# Altium PCB Gate Driver.PcbDoc (part 1 of 3)
Units mm, origin at the board's own origin, x right, y up, seen from the top; angles counter-clockwise.
Board outline 66.31 x 39.31 mm, 4 copper layers (L1 (Sig), L2 (-8V), L3 (POWER), L4 (Sig)), stack 0.603 mm thick; 125 components, 59 nets, 325 pads, 255 vias.
Unrouted connection lines stored in the file: 241.
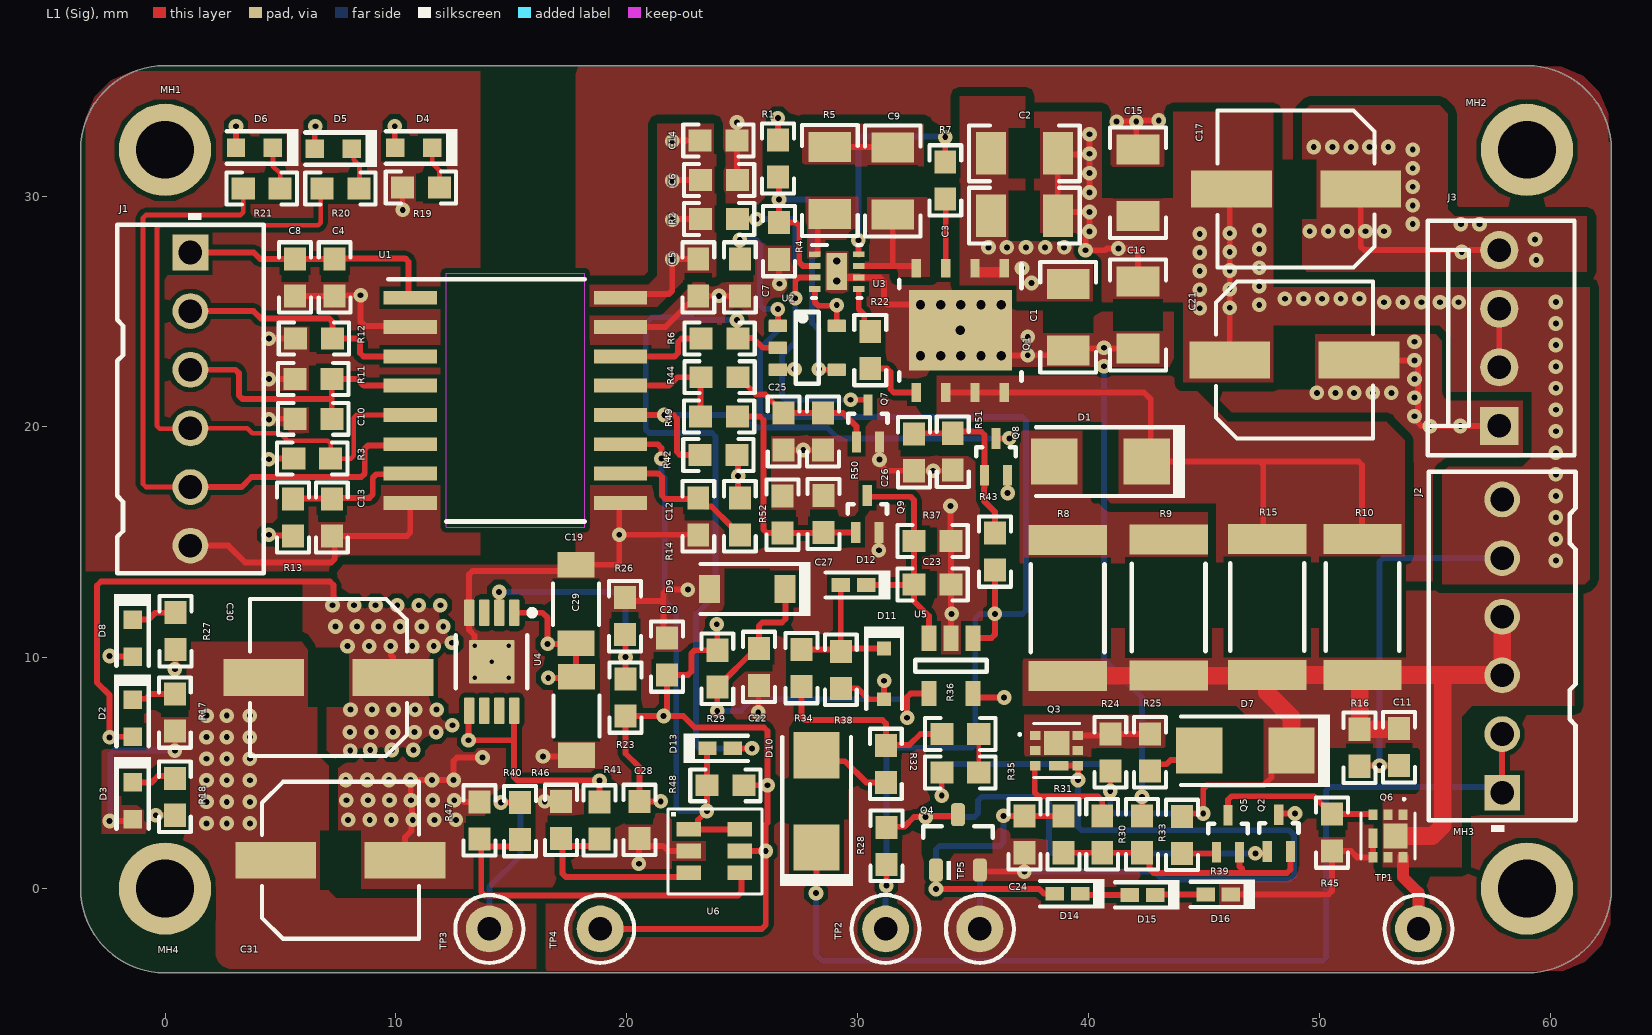
[diagram p0: L1 (Sig) view]
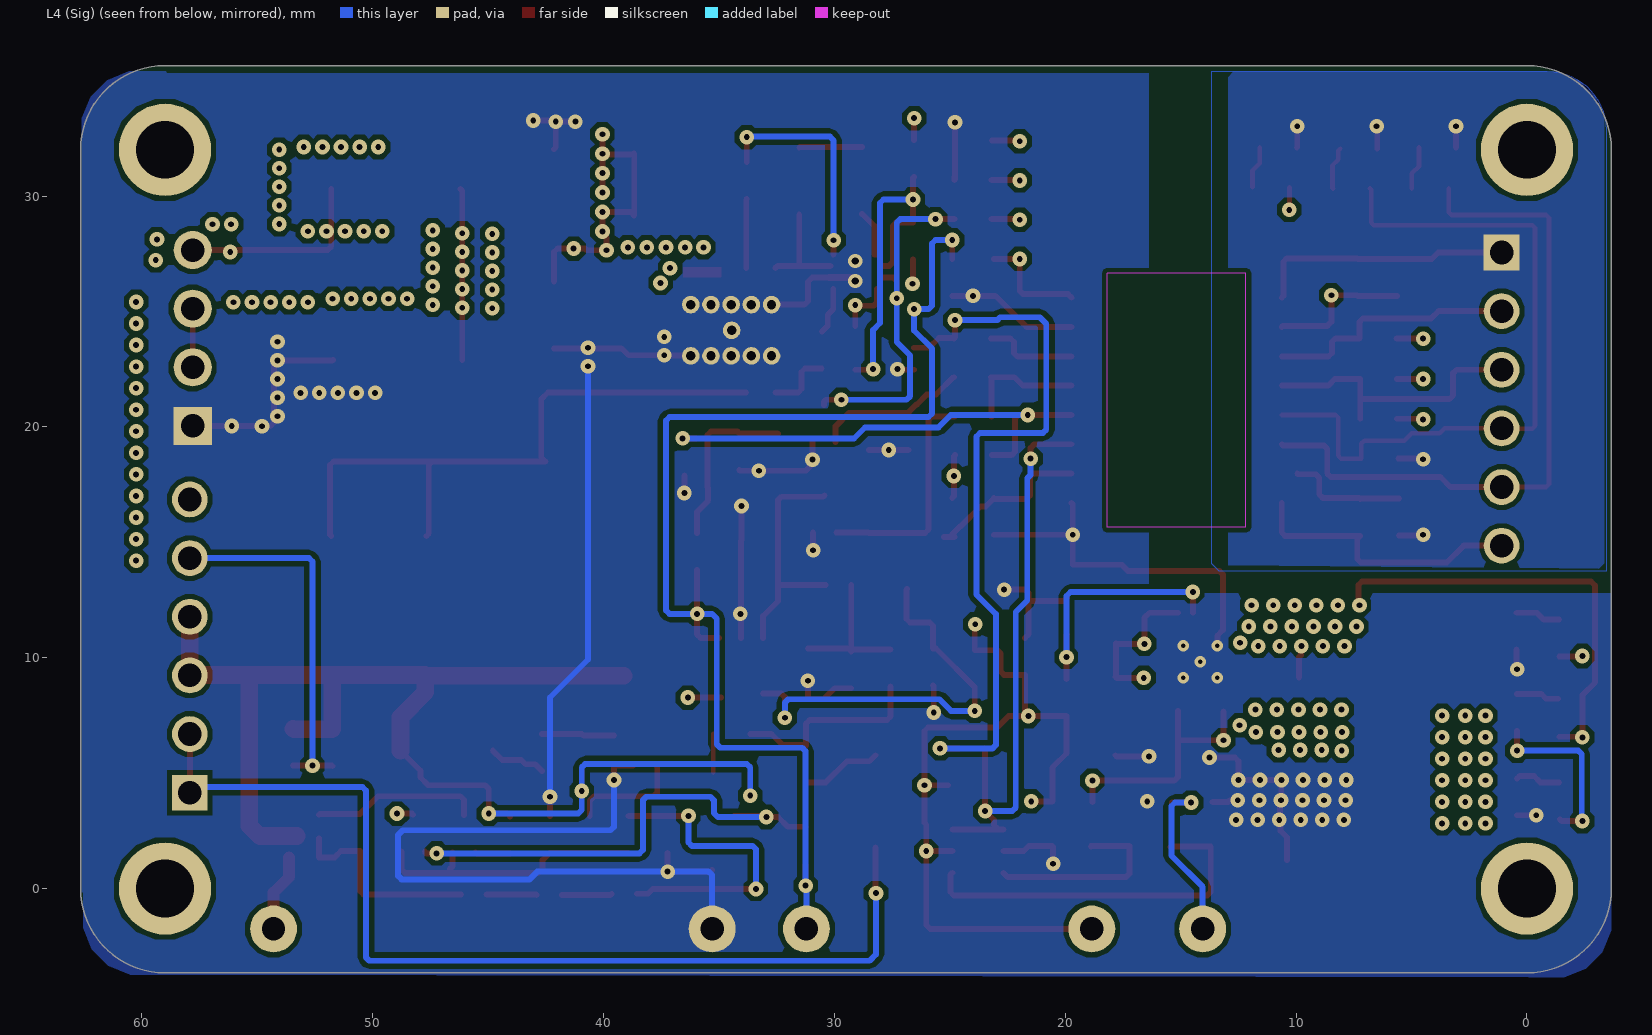
[diagram p1: L4 (Sig) view, seen from below]
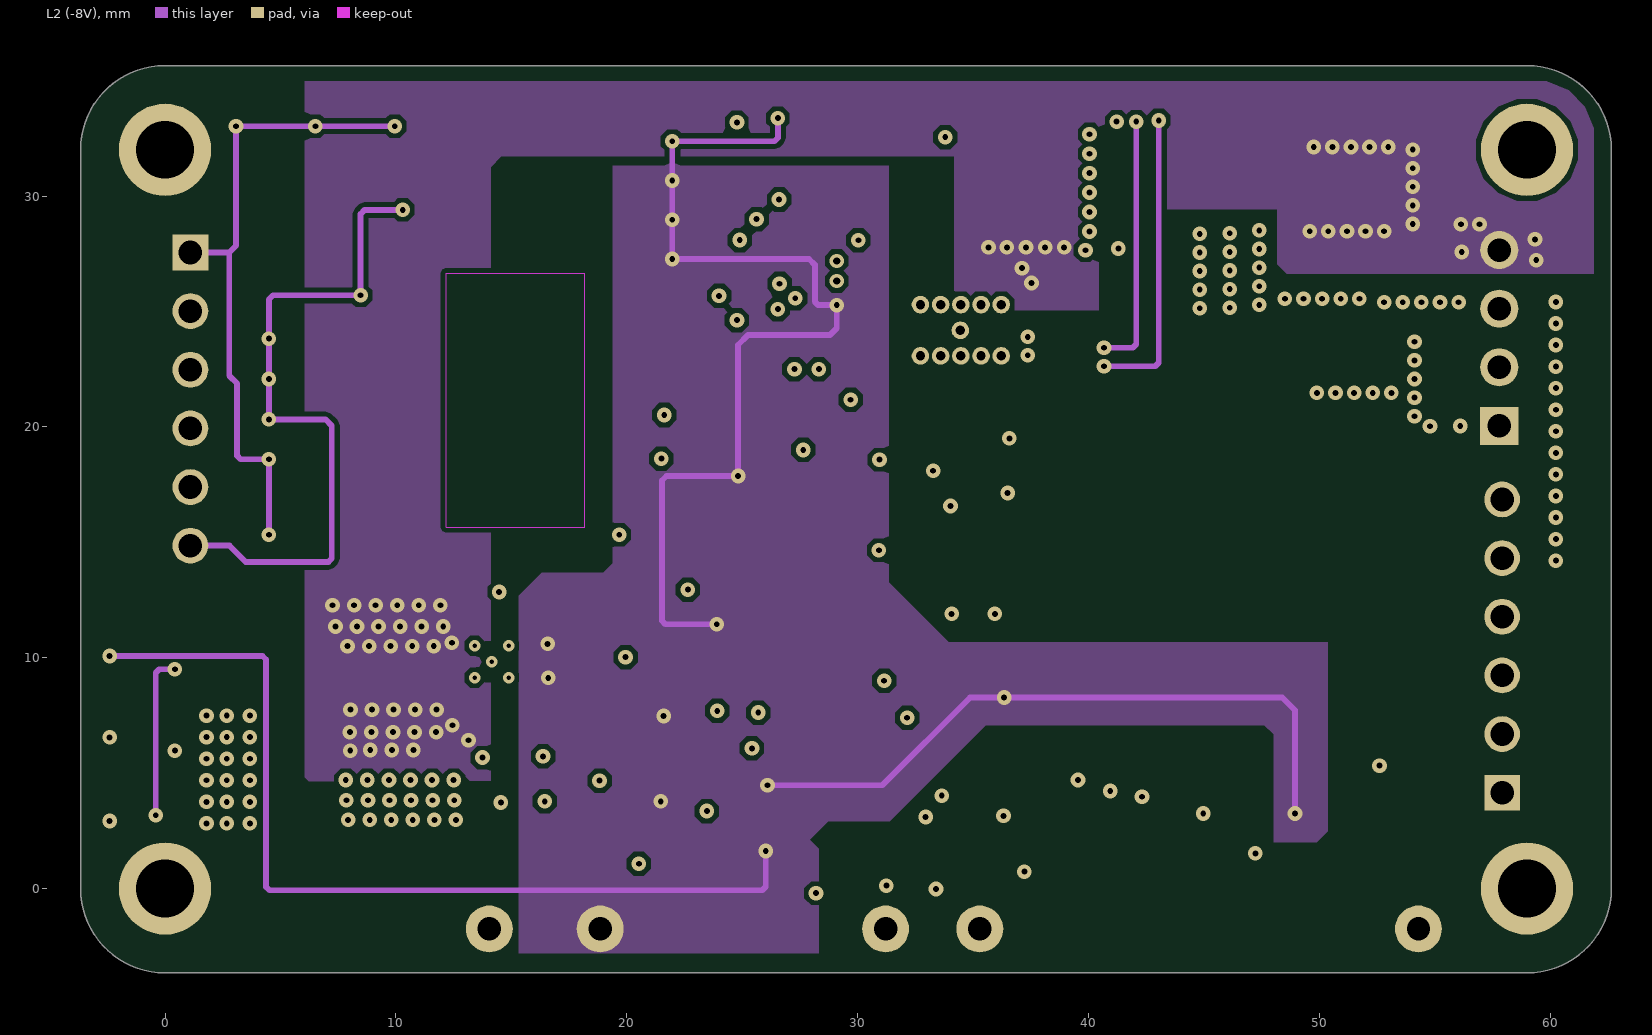
[diagram p2: L2 (-8V)]
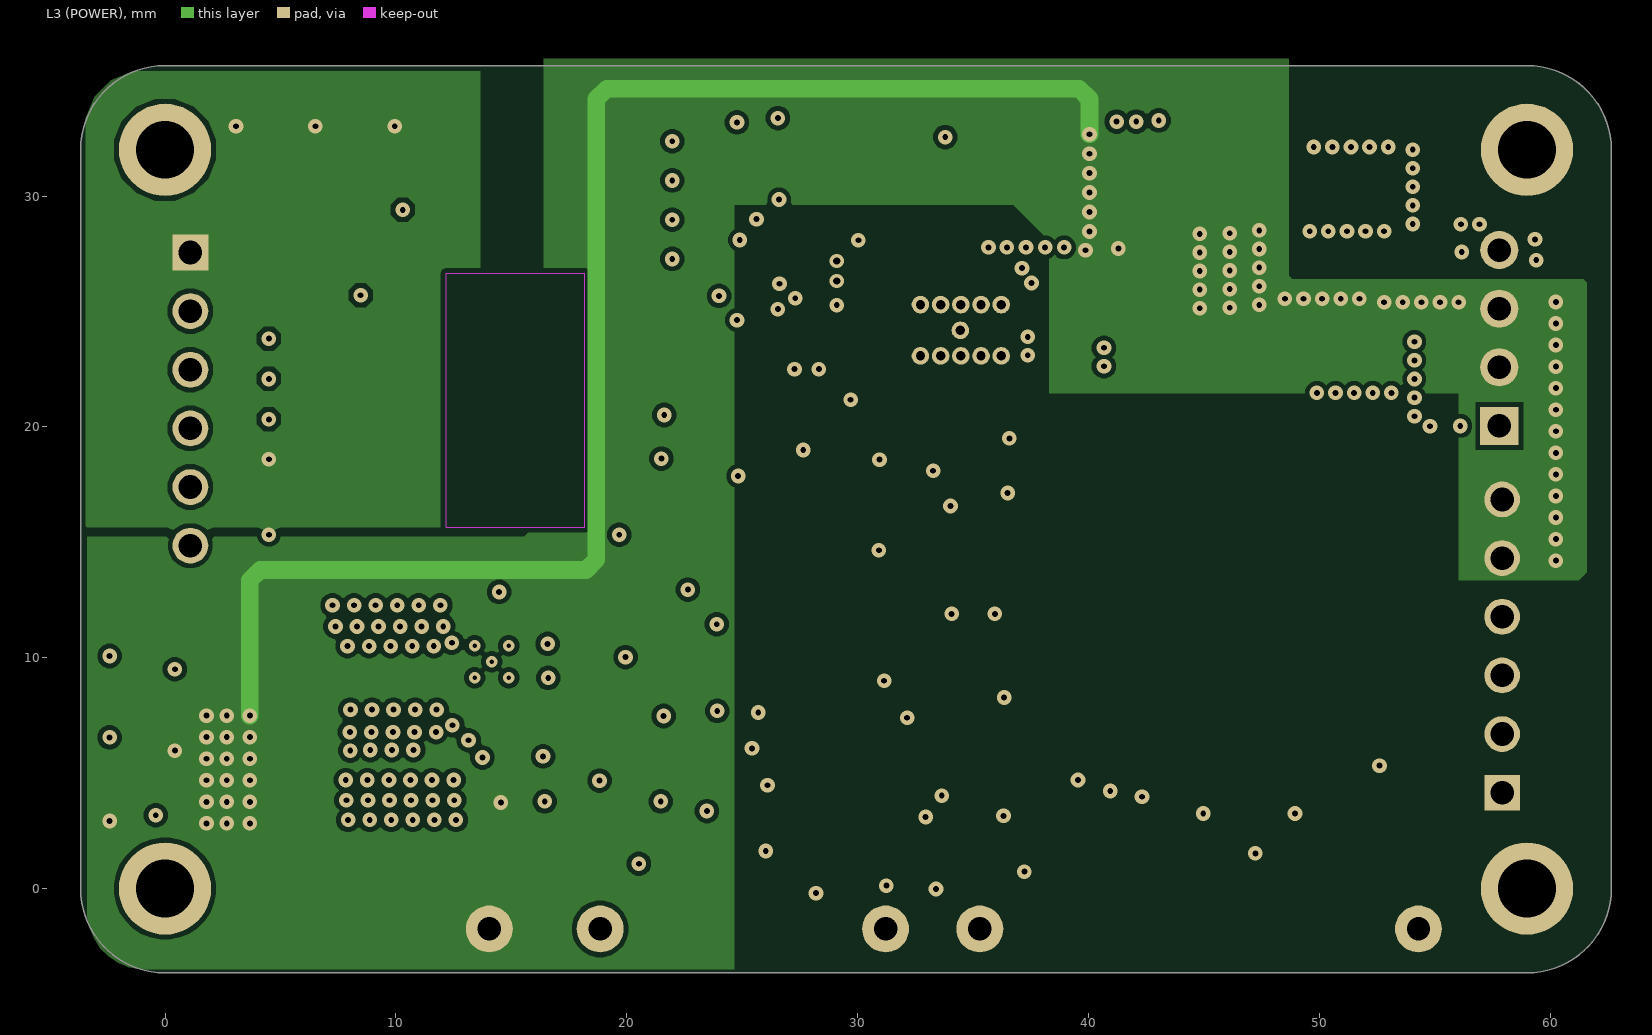
[diagram p3: L3 (POWER)]

## Layer stack, top to bottom
Top Solder: solder mask 0.0102, Solder Resist, Dk 3.5
L1 (Sig): signal copper 0.0356
Dielectric 2: prepreg 0.0711, PP-006, Dk 4.1
L2 (-8V): signal copper 0.035
Dielectric 1: dielectric 0.32, FR-4, Dk 4.8
L3 (POWER): signal copper 0.035
Dielectric 3: prepreg 0.0711, PP-006, Dk 4.1
L4 (Sig): signal copper 0.0356
Bottom Solder: solder mask 0.0102, Solder Resist, Dk 3.5

## Board outline
0,-3.653 cw(c0,0) -3.653,0 -3.653,32 cw(c0,32) 0,35.653 59,35.653 cw(c59,32) 62.653,32 62.653,0 cw(c59,0) 59,-3.653

## Design rules (kind name [scope] priority, off if disabled: settings)
AcuteAngle [All] p1: minimum=4.50000000000000E+0001 checktracksonly=FALSE
AssemblyTestPointUsage [All] p1: valid=2
Clearance Poly_Poly [InPolygon vs InPolygon] p1: gap=0.381 ignorepadtopadclearanceinfootprint=FALSE
Clearance "Poly_ All" [InPolygon] p2: gap=0.203 ignorepadtopadclearanceinfootprint=FALSE
Clearance "Less Than 9 mils from PAD to PAD" [(InPadClass('Less than 9 Mil Clearance')) vs (InPadClass('Less than 9 Mil Clearance'))] p3: gap=0.051 ignorepadtopadclearanceinfootprint=FALSE
Clearance "SMT Pin Via" [IsVia vs IsSMTPin] p4: gap=0 ignorepadtopadclearanceinfootprint=FALSE
Clearance "Via to Via" [IsVia vs IsVia] p5: gap=0.127 ignorepadtopadclearanceinfootprint=FALSE
Clearance [All] p6: gap=0.102 ignorepadtopadclearanceinfootprint=FALSE
ComponentClearance ComponentClearance_Shunt [InComponentClass('Header') vs InComponentClass('Shunt')] p1: gap=0 collisioncheckmode=3 verticalgap=0 showdistances=TRUE checkcomponentboundary=TRUE
ComponentClearance ComponentClearance_Logo [InComponentClass('Logo')] p2: gap=0.254 collisioncheckmode=3 verticalgap=0.254 showdistances=TRUE checkcomponentboundary=TRUE
ComponentClearance ComponentClearance_ScrewToNut [(HasFootprint('NY PMS 440 0025 PH')) vs (HasFootprint('Keystone_1902C'))] p3: gap=0.127 collisioncheckmode=3 verticalgap=0.127 showdistances=TRUE checkcomponentboundary=TRUE
ComponentClearance ComponentClearance_MountingHoles [InComponentClass('Mounting Holes')] p4: gap=0.508 collisioncheckmode=3 verticalgap=2540 showdistances=TRUE checkcomponentboundary=TRUE
ComponentClearance ComponentClearance_SmallPassives [HasFootprint('0201*') or HasFootprint('0402*') or HasFootprint('0508') or HasFootprint('0603*') or HasFootprint('0612') or HasFootprint('0805*') or HasFootprint('0815*') or HasFootprint('0830*') or HasFootprint('1206*') or HasFootprint('1210*') or HasFootprint('1808*') or HasFootprint('1812*') or HasFootprint('1825*') or HasFootprint('2010*') or HasFootprint('2220*') or HasFootprint('2225*') or HasFootprint('2512*') or HasFootprint('2728*') or HasFootprint('3518*') vs HasFootprint('0201*') or HasFootprint('0402*') or HasFootprint('0508') or HasFootprint('0603*') or HasFootprint('0612') or HasFootprint('0805*') or HasFootprint('0815*') or HasFootprint('0830*') or HasFootprint('1206*') or HasFootprint('1210*') or HasFootprint('1808*') or HasFootprint('1812*') or HasFootprint('1825*') or HasFootprint('2010*') or HasFootprint('2220*') or HasFootprint('2225*') or HasFootprint('2512*') or HasFootprint('2728*') or HasFootprint('3518*')] p5: gap=0.102 collisioncheckmode=3 verticalgap=0.102 showdistances=TRUE checkcomponentboundary=TRUE
ComponentClearance ComponentClearance_THtoSMT [IsThruComponent vs IsSMTComponent] p6: gap=0.254 collisioncheckmode=3 verticalgap=0.254 showdistances=TRUE checkcomponentboundary=TRUE
ComponentClearance ComponentClearance_THtoTH [IsThruComponent vs IsThruComponent] p7: gap=0.254 collisioncheckmode=3 verticalgap=0.254 showdistances=TRUE checkcomponentboundary=TRUE
ComponentClearance [All] p8: gap=0.102 collisioncheckmode=3 verticalgap=0.102 showdistances=TRUE checkcomponentboundary=TRUE
DiffPairsRouting [All] p1: maxlimit=2.54 minlimit=0.254 mostfreqgap=0.254 toplayer_minwidth=0.381 toplayer_maxwidth=0.381 toplayer_prefwidth=0.381 midlayer1_minwidth=0.381 midlayer1_maxwidth=0.381 midlayer1_prefwidth=0.381 midlayer2_minwidth=0.381 midlayer2_maxwidth=0.381 midlayer2_prefwidth=0.381 bottomlayer_minwidth=0.381 bottomlayer_maxwidth=0.381 bottomlayer_prefwidth=0.381 maxuncoupledlength=25.4
FabricationTestPointUsage TestPointUsage [All] p1: valid=2 allowmultiple=FALSE
FabricationTestpoint Testpoint [All] p1: side=3 testpointundercomponent=TRUE minsize=1.016 maxsize=2.54 preferedsize=1.524 minholesize=0 maxholesize=1.016 preferedholesize=0.813 testpointgrid=0.025 allowsidetop=TRUE allowsidebottom=TRUE usegrid=TRUE gridtolerance=0
FanoutControl Fanout_LCC [IsLCC] p1: bgadir=Out bgaviamode=Centered fanoutstyle=Auto fanoutdirection=Alternating viagrid=0.025 // Fanout_LCC (Default Rule)
FanoutControl Fanout_BGA [IsBGA] p2: bgadir=Out bgaviamode=Centered fanoutstyle=Auto fanoutdirection=Alternating viagrid=0.025 // Fanout_BGA (Default Rule)
FanoutControl Fanout_Default [All] p4: bgadir=Out bgaviamode=Centered fanoutstyle=Auto fanoutdirection=Alternating viagrid=0.025 // Fanout_Default (Default Rule)
FanoutControl Fanout_Small [(CompPinCount < 5)] p5: bgadir=Out bgaviamode=Centered fanoutstyle=Auto fanoutdirection=OutThenIn viagrid=0.025 // Fanout_Small (Default Rule)
Height [All] p1: minheight=0 maxheight=254 prefheight=50.8
HoleSize [All] p1: absolutevalues=TRUE maxlimit=2.54 minlimit=0.15 maxpercent=80.000 minpercent=20.000
HoleToHoleClearance [All] p1: gap=0.102 allowstackedmicrovias=TRUE
MinimumAnnularRing MinimumAnnularRing_ThermalPadVias [IsVia and InAnyComponent] p1: minimumring=0.15
MinimumAnnularRing [All] p2: minimumring=0.15
MinimumSolderMaskSliver MinimumSolderMaskSliver_Logo [InComponentClass('Logo') vs InComponentClass('Logo')] p1: minsoldermaskwidth=0.18
MinimumSolderMaskSliver [All] p2: minsoldermaskwidth=0
PlaneConnect [All] p1: planeconnectstyle=Relief reliefexpansion=0.254 reliefentries=4 reliefconductorwidth=0.254 reliefairgap=0.254
PolygonConnect [All] p1: connectstyle=Direct reliefconductorwidth=0.254 reliefentries=4 polygonreliefangle="90 Angle" airgapwidth=0.254
RoutingCorners [All] p1: cornerstyle=45-Degree minsetback=0.635 maxsetback=0.635
RoutingVias [All] p1: holewidth=0.254 width=0.635 viastyle="Through Hole" minholewidth=0.203 minwidth=0.508 maxholewidth=0.305 maxwidth=0.813
SMDToCorner [All] p1: distance=30000
SilkToSilkClearance [All] p1: silktosilkclearance=0.102
SilkToSolderMaskClearance SilkscreenOverComponentPads [IsPad] p1: minsilkscreentomaskgap=0.127 clearancetoexposedcopper=TRUE
SolderMaskExpansion SolderMaskExpansion_via [IsVia] p1: expansion=0.102 istentingtop=TRUE
SolderMaskExpansion [All] p2: expansion=0.064 istentingtop=FALSE
UnRoutedNet [All] p1: checkbadconnections=TRUE
UnpouredPolygon [All] p1: allowunpoured=TRUE allowshelved=TRUE
Width Width_power [InNetClass('POWER')] p1: maxlimit=1.27 minlimit=0.254 preferedwidth=0.762
Width [All] p2: maxlimit=1.27 minlimit=0.203 preferedwidth=0.254 checkconnectedcopper=TRUE
11 further rules are at their usual default settings.

## Classes and differential pairs
net class HV: 0V +3V3 +15V -3V -8V AGND COLLECTOR GATE NetD1_2 SW_A

## Components (designator, comment, footprint, x,y, rotation, side; value= is the part's Value field where it differs from the comment)
C1 "35V 10uF" 1206 39.125,24.75 r270 top value=10uF
C2 "35V 10uF" 1206 37.225,31.85 r0 top value=10uF
C3 "0.1 1uf" 1206 37.225,29.15 r0 top value="50V 0.1uF"
C4 "0.1 1uf" 0603 7.35,26.475 r270 top value="50V 0.1uF"
C5 "0.1 1uf" 0603 23.1,26.475 r270 top value="50V 0.1uF"
C6 "0.1 1uf" 0603 24,30.7 r180 top value="50V 0.1uF"
C7 "75pF" 0603 24.9,26.475 r270 top
C8 "1uf" 0603 5.625,26.475 r270 top value="50V 0.1uF"
C9 "1uf" 1206 31.525,30.65 r270 top value="50V 1uF"
C10 "75pF" 0603 6.425,20.35 r180 top
C11 "1uF" 0603_2 53.45,6.125 r270 top
C12 "0.1 1uf" 0603 23.1,16.125 r270 top value="50V 0.1uF"
C13 "0.1 1uf" 0603 7.225,16.075 r270 top value="50V 0.1uF"
C14 "0.1 1uf" 0603 23.975,32.4 r0 top value="50V 0.1uF"
C15 "35V 10uF" 1206 42.15,30.575 r90 top value=10uF
C16 "0.1 1uf" 1206 42.15,24.85 r270 top value="50V 0.1uF"
C17 "25V 100uF" SM_RADIAL_6.3BMM 49,30.3 r180 top value="100V 100uF"
C19 "50V 4.7uF" 1206_190 17.8,12.325 r90 top value=4.7uF
C20 "1000pF" 0603 21.75,10.05 r90 top value="50V 1000pF"
C21 "25V 100uF" SM_RADIAL_6.3BMM 48.925,22.9 r0 top value="100V 100uF"
C22 "0.1 1uf" 0603 25.725,9.6 r90 top value="50V 0.1uF"
C23 "470pF" 0603 33.25,13.175 r0 top value="50V 470pF"
C24 "56pF" 0603 37.225,2.35 r270 top value="50V 56pF"
C25 "75pF" 0603 26.8,19.8 r270 top
C26 "75pF" 0603 32.45,18.9 r270 top
C27 "75pF" 0603 28.525,16.225 r90 top
C28 "0.1 1uf" 0603 20.55,2.975 r270 top value="50V 0.1uF"
C29 "50V 4.7uF" 1206_190 17.825,7.475 r270 top value=4.7uF
C30 "25V 100uF" SM_RADIAL_6.3BMM 7.075,9.15 r180 top value="100V 100uF"
C31 "25V 100uF" SM_RADIAL_6.3BMM 7.6,1.225 r0 top value="100V 100uF"
D1 "MBRA340T3G" SMA 40.525,18.5 r180 top value=Schottky
D2 "LED" WL-SMCW_GREEN -1.4,7.375 r270 top value=Green
D3 "LED" WL-SMCW_GREEN -1.4,3.8 r270 top value=Green
D4 "LED" WL-SMCW_RED 10.775,32.1 r180 top value="Super Red"
D5 "LED" WL-SMCW_YELLOW 7.288,32.05 r180 top value=Yellow
D6 "LED" WL-SMCW_RED 3.875,32.1 r180 top value="Super Red"
D7 "ZD14V" SMA 46.8,5.975 r180 top
D8 "LED" WL-SMCW_GREEN -1.4,10.85 r270 top value=Green
D9 "ZD3V" SOD-123 25.225,12.975 r180 top
D10 "BYG23T-M3/TR" SMA 28.225,3.775 r90 top value=Ultrafast
D11 "ZD6.2V" sod-323 31.15,9.3 r270 top
D12 "1N4148X-TP" SOD-523 29.825,13.15 r180 top value=75V
D13 "1N4148X-TP" SOD-523 24.05,6.075 r0 top value=75V
D14 "1N4148X-TP" SOD-523 39.1,-0.225 r180 top value=75V
D15 "1N4148X-TP" SOD-523 42.35,-0.275 r180 top value=75V
D16 "1N4148X-TP" SOD-523 45.625,-0.25 r180 top value=75V
J1 "CN-06" Molex_22-23-2061 1.1,21.205 r270 top
J2 "CN-06" Molex_22-23-2061 57.925,10.505 r90 top
J3 "CN-04" CONN_22112042 57.8,23.85 r90 top
MH1 "MH" "Mounting Hole"#1 0,31.575 r0 top
MH2 "MH" "Mounting Hole"#1 59,31.575 r0 top
MH3 "MH" "Mounting Hole"#2 59,0 r0 top
MH4 "MH" "Mounting Hole"#2 0,0 r0 top
Q1 "CSD87350Q5D" DQY0008A 34.454,24.185 r270 top value="SYN MOSFET"
Q2 "MMBT3904T" SOT-523_2 48.25,2.4 r90 top value=NPN
Q3 "CSD17313Q2" TRANS_CSD17313Q2 38.625,5.975 r0 top value=N-MOSFET
Q4 "DSS4160T" SOT-23 34.35,2 r90 top value=NPN
Q5 "TR-MMBT3906T" SOT-523_2 46.05,2.375 r90 top value=MMBT3906T-7-F
Q6 "CSD17313Q2" TRANS_CSD17313Q2 52.975,2.275 r270 top value=N-MOSFET
Q7 "MMBT3904T" SOT-523_2 30.45,20.15 r90 top value=NPN
Q8 "MMBT3904T" SOT-523_2 36,18.7 r90 top value=NPN
Q9 "MMBT3904T" SOT-523_2 30.425,16.225 r90 top value=NPN
R1 "2.2KΩ" 0603 26.55,31.625 r90 top value=2.2k
R2 "4.7KΩ" 0603 24,29 r180 top value=4.7k
R3 "4.7KΩ" 0603 6.375,18.625 r180 top value=4.7k
R4 "1KΩ" 0603 26.6,28.05 r270 top value=1.0k
R5 "10Ω" 1206 28.8,30.675 r270 top value=10
R6 "1KΩ" 0603 24.025,23.827 r180 top value=1.0k
R7 "0Ω" 0603 33.8,30.675 r270 top
R8 "1Ω" 2512 39.1,12.15 r90 top value=1.00
R9 "1Ω" 2512 43.475,12.175 r90 top value=1.00
R10 "2Ω" 2512 51.875,12.2 r270 top value=2.00
R11 "4.7KΩ" 0603 6.425,22.075 r0 top value=4.7k
R12 "4.7KΩ" 0603 6.45,23.825 r0 top value=4.7k
R13 "4.7KΩ" 0603 5.55,16.075 r270 top value=4.7k
R14 "4.7KΩ" 0603 24.9,16.125 r90 top value=4.7k
R15 "2Ω" 2512 47.75,12.2 r270 top value=2.00
R16 "10KΩ" 0603 51.75,6.1 r90 top value=10k
R17 "10KΩ" 0603 0.425,7.625 r90 top value=10k
R18 "10KΩ" 0603 0.425,3.975 r90 top value=10k
R19 "10KΩ" 0603 11.087,30.375 r0 top value=10k
R20 "10KΩ" 0603 7.6,30.325 r0 top value=10k
R21 "10KΩ" 0603 4.187,30.325 r0 top value=10k
R22 "0Ω" 0603 30.55,23.325 r270 top
R23 "332KΩ" 0603 19.95,8.275 r270 top value=332k
R24 "390Ω" 0603 40.95,5.9 r270 top value=390
R25 "15Ω" 0603 42.675,5.9 r270 top value=15
R26 "100KΩ" 0603 19.925,11.8 r270 top
R27 "2.2KΩ" 0603 0.45,11.15 r90 top value=2.2k
R28 "4.7KΩ" 0603 31.25,1.85 r90 top value=4.7k
R29 "4.7KΩ" 0603 23.925,9.525 r90 top value=4.7k
R30 "10Ω" 0603 40.6,2.35 r90 top value=10.0
R31 "330Ω" 0603 38.925,2.35 r270 top value=330
R32 "150Ω" 0603 31.225,5.4 r90 top value=150
R33 "1KΩ" 0603 42.325,2.35 r270 top value=1.0k
R34 "2.2KΩ" 0603 27.575,9.55 r90 top value=2.2k
R35 "1KΩ" 0603 34.45,5.025 r0 top value=1.0k
R36 "1KΩ" 0603 34.45,6.7 r180 top value=1.0k
R37 "1.8KΩ" 0603 33.25,15.05 r180 top value=1.8k
R38 "1.8KΩ" 0603 29.275,9.475 r90 top value=1.8k
R39 "10KΩ" 0603 44.05,2.325 r270 top value=10k
R40 "220KΩ" 0603 15.375,2.925 r90 top value=220k
R41 "220KΩ" 0603 18.825,2.95 r90 top value=220k
R42 "4.7KΩ" 0603 23.975,18.775 r0 top value=4.7k
R43 "1KΩ" 0603 35.95,14.6 r270 top value=1.0k
R44 "1KΩ" 0603 24.025,22.15 r0 top value=1.0k
R45 "4.7KΩ" 0603 50.55,2.425 r90 top value=4.7k
R46 "4.12KΩ" 0603 17.15,2.975 r270 top value=4.12k
R47 "9.76KΩ" 0603 13.625,2.95 r270 top value=9.76k
R48 "100KΩ" 0603 24.275,4.475 r180 top
R49 "1KΩ" 0603 24,20.45 r0 top value=1.0k
R50 "15KΩ" 0603 28.5,19.8 r90 top value=15k
R51 "15KΩ" 0603 34.125,18.925 r90 top value=15k
R52 "15KΩ" 0603 26.75,16.2 r270 top value=15k
TP1 "5000" Keystone5000 54.3,-1.75 r0 top value=Red
TP2 "5000" Keystone5000 31.213,-1.75 r0 top value=Red
TP3 "5000" Keystone5000 14.05,-1.75 r0 top value=Red
TP4 "5000" Keystone5000 18.85,-1.75 r0 top value=Red
TP5 "5000" Keystone5000 35.3,-1.75 r0 top value=Red
U1 "ISO7842DWR" DW0016B_N 15.175,21.15 r0 top
U2 "SN74LVC1G125DCK" DBV0005A_L 27.825,23.425 r0 top
U3 "TPS51604DSG" DSG0008A 29.1,26.725 r0 top
U4 "TPS7A4201DGNT" DGN0008B_L 14.15,9.825 r270 top
U5 "TLV3201DBV" DBV0005A_N 34.05,9.65 r270 top
U6 "TPS3700DDC" SOT23-6 23.825,1.625 r0 top

## Footprints (in the part's own frame and the unit in brackets; to place one, negate y for a bottom-side part, rotate by r counter-clockwise, add the part's x,y. Pads: shape width x height; smd on the part's side, far side on the other; paste and mask are expansions set on the pad)
0603 [mm]
  rect 1x0.95 smd: 1(-0.8,0) 2(0.8,0)
  L1 (Sig) pour cut-out: -0.2,0.6 0.2,0.6 0.2,-0.6 -0.2,-0.6
  silkscreen extent -1.52,-0.69 1.52,0.69, body extent -0.87,-0.47 0.87,0.47, height 0.85
0603_2 [mm]
  rect 1x0.95 smd: 1(-0.8,0) 2(0.8,0)
  L1 (Sig) pour cut-out: -0.2,0.6 0.2,0.6 0.2,-0.6 -0.2,-0.6
  silkscreen extent -1.52,-0.69 1.52,0.69, body extent -0.87,-0.47 0.87,0.47, height 0.85
1206 [mm]
  rect 1.3x1.85 smd: 1(-1.45,0) 2(1.45,0)
  L1 (Sig) pour cut-out: -0.7,1.1 0.7,1.1 0.7,-1.1 -0.7,-1.1
  silkscreen extent -2.4,-1.21 2.4,1.21, body extent -1.7,-0.9 1.7,0.9, height 1.35
1206_190 [mm]
  rect 1.1x1.6 smd: 1(-1.7,0) 2(1.7,0)
  L1 (Sig) pour cut-out: -1.1,1 1.1,1 1.1,-1 -1.1,-1
  silkscreen extent -0.9,-1 0.9,1, body extent -1.75,-0.95 1.75,0.95, height 1.9
2512 [mm]
  rect 1.3x3.4 smd: 1(-2.95,0) 2(2.95,0)
  L1 (Sig) pour cut-out: -2.2,1.9 2.2,1.9 2.2,-1.9 -2.2,-1.9
  silkscreen extent -1.9,-1.6 1.9,1.6, body extent -3.22,-1.67 3.22,1.67, height 0.71
CONN_22112042 [mm]
  rect 1.65x1.65 hole 1.016: 1(-3.81,0)
  round 1.65 hole 1.016: 2(-1.27,0) 3(1.27,0) 4(3.81,0)
  silkscreen extent -5.08,-3.25 5.08,3.1, body extent -5,-3.25 5,3.1, height 10.68
DBV0005A_L [mm] "SOT23, 5-Leads, Body 3.05x1.75mm, Pitch 0.95mm, IPC High Density"
  rrect18% 0.8x0.55 smd: 1(-1.275,0.95) 2(-1.275,0) 3(-1.275,-0.95) 4(1.275,-0.95) 5(1.275,0.95)
  L1 (Sig) pour cut-out: -0.7,1.6 0.7,1.6 0.7,-1.6 -0.7,-1.6
  silkscreen extent -0.5,-1.55 0.5,1.55, body extent -1.42,-1.46 1.42,1.46, height 1.08
DBV0005A_N [mm]
  rect 1.1x0.65 smd: 1(-1.2,0.95) 2(-1.2,0) 3(-1.2,-0.95) 4(1.2,-0.95) 5(1.2,0.95)
  L1 (Sig) pour cut-out: -0.5,1.6 0.5,1.6 0.5,-1.6 -0.5,-1.6
  silkscreen extent -0.25,-1.55 0.25,1.55, body extent -1.42,-1.46 1.42,1.46, height 1.08
DGN0008B_L [mm] "TSOP, 8-Leads, Body 3.1x3.1mm, Pitch 0.65mm, Thermal Pad 1.98x1.88mm, IPC High Density"
  rrect22% 1.15x0.45 smd: 1(-2.125,0.975) 2(-2.125,0.325) 3(-2.125,-0.325) 4(-2.125,-0.975) 5(2.125,-0.975) 6(2.125,-0.325) 7(2.125,0.325) 8(2.125,0.975)
  rrect5% 1.88x1.98 smd: 9(0,0)
  silkscreen extent -2.25,-1.55 1.15,1.88, body extent -2.45,-1.5 2.45,1.5, height 0.94
DQY0008A [mil]
  rect 31.89x16.14 smd: 1(-106,75) 2(-106,25) 3(-106,-25) 4(-106,-75) 5(106,-75) 6(106,-25) 7(106,25) 8(106,75)
  round 30 hole 16: 9(-43.7,69.73) 9(-43.7,35.29) 9(-43.7,0.84) 9(-43.7,-33.61) 9(-43.7,-68.06) 9(0,0) 9(43.7,69.73) 9(43.7,35.29) 9(43.7,0.84) 9(43.7,-33.61) 9(43.7,-68.06)
  rect 137.01x175.59 smd paste-87.3: 9(0,0)
  L1 (Sig) region: -107.77,16.93 -90.05,16.93 -90.05,83.07 -107.77,83.07
  silkscreen extent -112,-104 86,104, body extent -122,-102 122,102, height 59
DSG0008A [mm]
  rect 0.5x0.25 smd: 1(-0.95,0.75) 2(-0.95,0.25) 3(-0.95,-0.25) 4(-0.95,-0.75) 5(0.95,-0.75) 6(0.95,-0.25) 7(0.95,0.25) 8(0.95,0.75)
  rect 0.9x1.6 smd paste-0.45: 9(0,0)
  L1 (Sig) region: 0,-0.4 1.2,-0.4 1.2,-0.1 0,-0.1
  silkscreen extent -1.07,-1.15 1.07,1.15, body extent -1.05,-1.05 1.05,1.05, height 0.8
DW0016B_N [mm]
  rect 2.3x0.6 smd: 1(-4.55,4.445) 2(-4.55,3.175) 3(-4.55,1.905) 4(-4.55,0.635) 5(-4.55,-0.635) 6(-4.55,-1.905) 7(-4.55,-3.175) 8(-4.55,-4.445) 9(4.55,-4.445) 10(4.55,-3.175) 11(4.55,-1.905) 12(4.55,-0.635) 13(4.55,0.635) 14(4.55,1.905) 15(4.55,3.175) 16(4.55,4.445)
  Keep-Out Layer lines w0.05: -3,-5.5 3,-5.5 3,5.5 -3,5.5 -3,-5.5
  silkscreen extent -5.5,-5.25 3,5.25, body extent -3.8,-5.25 3.8,5.25, height 2.66
Keystone5000 [mil]
  round 80 hole 40: 1(0,0)
  silkscreen extent -58,-58 58,58, body extent -49,-49 49,49, height 182
Molex_22-23-2061 [mm]
  rect 1.55x1.55 hole 1.02: 1(-6.35,0)
  round 1.55 hole 1.02: 2(-3.81,0) 3(-1.27,0) 4(1.27,0) 5(3.81,0) 6(6.35,0)
  silkscreen extent -8.05,-3.18 7.54,3.18, body extent -7.54,-3.25 7.54,3.1, height 10.67
"Mounting Hole"#1 [mm]
  round 4 hole 2.5: 1(0,0.425)
"Mounting Hole"#2 [mm]
  round 4 hole 2.5: 1(0,0)
SM_RADIAL_6.3BMM [mm]
  rect 3.5x1.6 smd: 1(-2.8,0) 2(2.8,0)
  L1 (Sig) pour cut-out: -0.9,1.3 0.9,1.3 0.9,-1.3 -0.9,-1.3
  silkscreen extent -3.4,-3.4 3.4,3.4, body extent -3.4,-3.4 3.4,3.4, height 8
SMA [mm]
  rect 2x2 smd: 1(-2,0) 2(2,0)
  L1 (Sig) pour cut-out: -0.8,1.5 0.8,1.5 0.8,-1.4 -0.8,-1.4
  silkscreen extent -3.66,-1.57 2.79,1.57, body extent -2.6,-1.3 2.6,1.3, height 2.42
SOD-123 [mm]
  rect 0.915x1.22 smd: 1(-1.637,0) 2(1.637,0)
  L1 (Sig) pour cut-out: -1,0.9 1,0.9 1,-0.9 -1,-0.9
  silkscreen extent -2.74,-1.17 2.03,1.17, body extent -1.93,-0.9 1.93,0.9, height 1.35
sod-323 [mm]
  rect 0.6x0.6 smd paste-0.05: 1(-1.1,0) 2(1.1,0)
  L1 (Sig) pour cut-out: -0.7,0.8 0.7,0.8 0.7,-0.7 -0.7,-0.7
  silkscreen extent -2.06,-0.86 1.53,0.86, body extent -1.3,-0.67 1.3,0.68, height 1.1
SOD-523 [mm]
  rect 0.8x0.6 smd paste-0.05: 1(-0.55,0) 2(0.55,0)
  silkscreen extent -1.6,-0.63 1.2,0.64, body extent -0.8,-0.4 0.8,0.4, height 0.72
SOT23-6 [mil]
  rect 42x25 smd: 1(-45,37) 2(-45,0) 3(-45,-37) 4(42,-37) 5(42,0) 6(42,37)
  L1 (Sig) pour cut-out: -15.75,66.93 11.81,66.93 11.81,-62.99 -15.75,-62.99
  silkscreen extent -80,-73 80,72
SOT-23 [mm]
  rrect50% 1x0.6 smd: 1(-1.2,0.95) 2(-1.2,-0.95) 3(1.2,0)
  L1 (Sig) pour cut-out: -0.5,1.6 0.6,1.6 0.6,-1.5 -0.5,-1.5
  silkscreen extent -1.62,-1.5 0.7,1.5, body extent -1.16,-1.45 1.21,1.45, height 1
SOT-523_2 [mm]
  rect 0.9x0.4 smd: 1(-0.8,0.5) 2(-0.8,-0.5) 3(0.8,0)
  silkscreen extent 0.02,-0.85 0.42,0.85, body extent -0.8,-0.8 0.8,0.8, height 0.79
TRANS_CSD17313Q2 [mm]
  rect 0.455x0.4 smd paste-1: 1(-0.923,0.65) 2(-0.923,0) 3(-0.923,-0.65) 4(0.923,-0.65) 5(0.923,0) 6(0.923,0.65)
  rect 0.85x0.4 smd paste-0.05: 7(0.096,-0.65)
  rect 1.1x1.05 smd paste-0.05: 8(0,0.325)
  silkscreen extent -1.65,-1.17 1,1.17
WL-SMCW_GREEN [mm]
  rect 0.8x0.8 smd: 1(-0.8,0) 2(0.8,0)
  L1 (Sig) pour cut-out: -0.2,0.5 0.2,0.5 0.2,-0.5 -0.2,-0.5
  silkscreen extent -1.9,-0.8 1.2,0.8, body extent -0.85,-0.45 0.85,0.45, height 0.8
WL-SMCW_RED [mm]
  rect 0.8x0.8 smd: 1(-0.8,0) 2(0.8,0)
  L1 (Sig) pour cut-out: -0.2,0.6 0.2,0.6 0.2,-0.5 -0.2,-0.5
  silkscreen extent -1.9,-0.8 1.2,0.8, body extent -0.85,-0.45 0.85,0.45, height 0.8
WL-SMCW_YELLOW [mm]
  rect 0.8x0.8 smd: 1(-0.8,0) 2(0.8,0)
  L1 (Sig) pour cut-out: -0.2,0.6 0.2,0.6 0.2,-0.6 -0.2,-0.6
  silkscreen extent -1.9,-0.8 1.2,0.8, body extent -0.85,-0.45 0.85,0.45, height 0.8

## Part data
C1 C2 C15: library part GMK316AB7106KL, "CAP, CERM, 10 µF, 35 V, +/- 10%, X7R, 1206", Cap_Case=1206, Manufacturer="Taiyo Yuden", Supplier Part Number 1=587-3007-1-ND, TempCo=X7R, Tolerance_%=10, Value1=Unknown, Value2=35V, ValueDisplayed=10µF, Cap_F=0.00001, ComponentLink1Description="Datasheet link", ComponentLink1URL=http://www.yuden.co.jp/productdata/catalog/en/mlcc101_e.pdf, CompType=Capacitor, LatestRevisionDate=2015-04-23, MountType=SMT, PackageReference=1206, PartNumber=GMK316AB7106KL, Polarized=N, Published=2008-06-19, Publisher="Texas Instruments", RoHS=Y, Supplier 1=Digi-Key, Supplier 2=Mouser, Supplier 3=Farnell, Supplier Part Number 2=963-GMK316AB7106KL, Supplier Part Number 3=2309034, SymbolVersion=2008-07-09, TaMax_C=125, TaMin_C=-55, Technology=Ceramic, U/M=EA, VDC_V=35, Simulation ModelName=Cap, Simulation PortMap=(1:1),(2:2)
C3 C4 C5 C6 C8 C12 C13 C14 C16 C22 C28: library part 06035C104KAT2A, "CAP, CERM, 0.1 µF, 50 V, +/- 10%, X7R, 0603", Cap_Case=0603, Manufacturer=AVX, Supplier Part Number 1=478-5052-1-ND, TempCo=X7R, Tolerance_%=10, Value1=Unknown, Value2=50V, Cap_F=0.0000001, ComponentLink1Description="Datasheet link", ComponentLink1URL=http://www.avx.com/docs/Catalogs/cx7r.pdf, CompType=Capacitor, LatestRevisionDate=2015-04-23, MountType=SMT, PackageReference=0603, PartNumber=06035C104KAT2A, Polarized=N, Published=2008-06-19, Publisher="Texas Instruments", RoHS=Y, Supplier 1=Digi-Key, Supplier 2=Mouser, Supplier 3=Farnell, Supplier Part Number 2=581-06035C104KAT2A, Supplier Part Number 3=1301804, SymbolVersion=2008-07-09, TaMax_C=125, TaMin_C=-55, Technology=Ceramic, U/M=EA, VDC_V=50, Simulation ModelName=Cap, Simulation PortMap=(1:1),(2:2)
C7 C10 C25 C26 C27: library part GRM1885C1H750JA01D, "CAP, CERM, 75 pF, 50 V, +/- 5%, C0G/NP0, 0603", Cap_Case=0603, Manufacturer=MuRata, Supplier Part Number 1=490-1424-1-ND, TempCo=C0G/NP0, Tolerance_%=5, Value1=Unknown, Value2=50V, Cap_F=0.000000000075, ComponentLink1Description="Datasheet link", ComponentLink1URL=http://search.murata.co.jp/Ceramy/PnsearchViewAction.do?HnOFG=ON&HnNFG=ON&SEL_CNT=50&sLang=en&sKey=GRM1885C1H750JA01D&x=9&y=9&search=startwith, CompType=Capacitor, LatestRevisionDate=2015-06-13, MountType=SMT, PackageReference=0603, PartNumber=GRM1885C1H750JA01D, Polarized=N, Published=2008-06-19, Publisher="Texas Instruments", RoHS=Y, Supplier 1=Digi-Key, Supplier 2=Mouser, Supplier 3=Farnell, Supplier Part Number 2=81-GRM1885C1H750JA, Supplier Part Number 3=1690399, SymbolVersion=2008-07-09, TaMax_C=125, TaMin_C=-55, Technology=Ceramic, U/M=EA, ValueDisplayed=75pF, VDC_V=50, Simulation ModelName=Cap, Simulation PortMap=(1:1),(2:2)
C9: library part 08055C105KAT2A, "CAP, CERM, 1 µF, 50 V, +/- 10%, X7R, 0805", Cap_Case=0805, Manufacturer=AVX, Supplier Part Number 1=478-7956-1-ND, TempCo=X7R, Tolerance_%=10, Value1=Unknown, Value2=50V, Cap_F=0.000001, ComponentLink1Description="Datasheet link", ComponentLink1URL=http://www.avx.com/docs/Catalogs/cx7r.pdf, CompType=Capacitor, LatestRevisionDate=2015-05-02, MountType=SMT, PackageReference=0805, PartNumber=08055C105KAT2A, Polarized=N, Published=2008-06-19, Publisher="Texas Instruments", RoHS=Y, Supplier 1=Digi-Key, Supplier 2=Mouser, Supplier 3=Farnell, Supplier Part Number 2=581-08055C105KAT2A, Supplier Part Number 3=2094043, SymbolVersion=2008-07-09, TaMax_C=125, TaMin_C=-55, Technology=Ceramic, U/M=EA, VDC_V=50, Simulation ModelName=Cap, Simulation PortMap=(1:1),(2:2)
C11: library part 08055C105KAT2A_1, "DNP", Cap_Case=0805, Manufacturer=AVX, Supplier Part Number 1=478-7956-1-ND, TempCo=X7R, Tolerance_%=10, Value1=Unknown, Value2=50V, ValueDisplayed=1µF, Cap_F=0.000001, ComponentLink1Description="Datasheet link", ComponentLink1URL=http://www.avx.com/docs/Catalogs/cx7r.pdf, CompType=Capacitor, LatestRevisionDate=2015-05-02, MountType=SMT, PackageReference=0805, PartNumber=DNP, Polarized=N, Published=2008-06-19, Publisher="Texas Instruments", RoHS=Y, Supplier 1=Digi-Key, Supplier 2=Mouser, Supplier 3=Farnell, Supplier Part Number 2=581-08055C105KAT2A, Supplier Part Number 3=2094043, SymbolVersion=2008-07-09, TaMax_C=125, TaMin_C=-55, Technology=Ceramic, U/M=EA, VDC_V=50, Simulation ModelName=Cap, Simulation PortMap=(1:1),(2:2)
C17 C21 C30 C31: library part UUD1E101MCL1GS, "CAP, AL, 100 µF, 25 V, +/- 20%, 0.34 ohm, SMD", Cap_Case=6.3x7.7, Manufacturer=Nichicon, Supplier Part Number 1=493-2276-1-ND, Tolerance_%=20, Value1="0.34 ohm", Value2=25V, Cap_F=0.0001, ComponentLink1Description="Datasheet link", ComponentLink1URL=http://products.nichicon.co.jp/en/pdf/XJA043/e-ud.pdf, CompType=Capacitor, ESR_ohm=0.34, IRMS_A=0.28, LatestRevisionDate=2015-04-24, MountType=SMT, PackageReference=6.3x7.7, PartNumber=UUD1E101MCL1GS, Polarized=Y, Publisher="Texas Instruments", RoHS=Y, Series=uD, Supplier 1=Digi-Key, Supplier 2=Mouser, Supplier 3=Farnell, Supplier Part Number 2=647-UUD1E101MCL, Supplier Part Number 3=1823571, SymbolVersion=2008-07-09, TaMax_C=105, TaMin_C=-55, Technology=AL, U/M=EA, VDC_V=25, Simulation ModelName=Cap, Simulation PortMap=(1:1),(2:2)
C19 C29: library part UMK316AB7475KL-T, "CAP, CERM, 4.7 µF, 50 V, +/- 10%, X7R, 1206_190", Cap_Case=1206, Manufacturer="Taiyo Yuden", Supplier Part Number 1=587-2994-2-ND, TempCo=X7R, Tolerance_%=10, Value1=Unknown, Value2=50V, Cap_F=0.0000047, ComponentLink1Description="Datasheet link", ComponentLink1URL=http://www.yuden.co.jp/productdata/catalog/en/mlcc_all_e.pdf, CompType=Capacitor, LatestRevisionDate=2015-05-02, MountType=SMT, PackageReference=1206_190, PartNumber=UMK316AB7475KL-T, Polarized=N, Published=2008-06-19, Publisher="Texas Instruments", RoHS=Y, Supplier 1=Digi-Key, Supplier 2=Mouser, Supplier 3=Farnell, Supplier Part Number 2=963-UMK316AB7475KL-T, Supplier Part Number 3=2371497, SymbolVersion=2008-07-09, TaMax_C=125, TaMin_C=-55, Technology=Ceramic, U/M=EA, VDC_V=50, Simulation ModelName=Cap, Simulation PortMap=(1:1),(2:2)
C20: library part 06035A102KAT2A, "CAP, CERM, 1000 pF, 50 V, +/- 10%, C0G/NP0, 0603", Cap_Case=0603, Manufacturer=AVX, Supplier Part Number 1=478-3718-1-ND, TempCo=C0G/NP0, Tolerance_%=10, Value1="0.048 ohm", Value2=50V, Cap_F=0.000000001, ComponentLink1Description="Datasheet link", ComponentLink1URL=http://www.avx.com/docs/masterpubs/smccp.pdf, CompType=Capacitor, ESR_ohm=0.048, LatestRevisionDate=2015-04-23, MountType=SMT, PackageReference=0603, PartNumber=06035A102KAT2A, Polarized=N, Published=2008-06-19, Publisher="Texas Instruments", RoHS=Y, Supplier 1=Digi-Key, Supplier 2=Mouser, Supplier 3=Farnell, Supplier Part Number 2=581-06035A102KAT2A, Supplier Part Number 3=1582693, SymbolVersion=2008-07-09, TaMax_C=125, TaMin_C=-55, Technology=Ceramic, U/M=EA, VDC_V=50, Simulation ModelName=Cap, Simulation PortMap=(1:1),(2:2)
C23: library part 06035A471JAT2A, "CAP, CERM, 470 pF, 50 V, +/- 5%, C0G/NP0, 0603", Cap_Case=0603, Manufacturer=AVX, Supplier Part Number 1=478-1183-1-ND, TempCo=C0G/NP0, Tolerance_%=5, Value1="0.063 ohm", Value2=50V, Cap_F=0.00000000047, ComponentLink1Description="Datasheet link", ComponentLink1URL=http://www.avx.com/docs/masterpubs/smccp.pdf, CompType=Capacitor, ESR_ohm=0.063, LatestRevisionDate=2015-06-13, MountType=SMT, PackageReference=0603, PartNumber=06035A471JAT2A, Polarized=N, Published=2008-06-19, Publisher="Texas Instruments", RoHS=Y, Supplier 1=Digi-Key, Supplier 2=Mouser, Supplier 3=Farnell, Supplier Part Number 2=581-06035A471J, Supplier Part Number 3=316672, SymbolVersion=2008-07-09, TaMax_C=125, TaMin_C=-55, Technology=Ceramic, U/M=EA, VDC_V=50, Simulation ModelName=Cap, Simulation PortMap=(1:1),(2:2)
C24: library part 06035A560FAT2A, "CAP, CERM, 56 pF, 50 V, +/- 1%, C0G/NP0, 0603", Cap_Case=0603, Manufacturer=AVX, Supplier Part Number 1=478-7922-1-ND, TempCo=C0G/NP0, Tolerance_%=1, Value1=Unknown, Value2=50V, Cap_F=0.000000000056, ComponentLink1Description="Datasheet link", ComponentLink1URL=http://www.avx.com/docs/Catalogs/ccog.pdf, CompType=Capacitor, LatestRevisionDate=2015-06-13, MountType=SMT, PackageReference=0603, PartNumber=06035A560FAT2A, Polarized=N, Published=2008-06-19, Publisher="Texas Instruments", RoHS=Y, Supplier 1=Digi-Key, Supplier 2=Mouser, Supplier 3=Newark, Supplier Part Number 2=581-06035A560FAT2A, Supplier Part Number 3=11J1247, SymbolVersion=2008-07-09, TaMax_C=125, TaMin_C=-55, Technology=Ceramic, U/M=EA, VDC_V=50, Simulation ModelName=Cap, Simulation PortMap=(1:1),(2:2)
D1: "Diode, Schottky, 40 V, 3 A, SMA", Manufacturer="ON Semiconductor", Supplier Part Number 1=1431078, Value1=3A, Value2=0.415V, ComponentLink1Description="Datasheet link", ComponentLink1URL=http://www.onsemi.com/pub_link/Collateral/MBRA340T3-D.PDF, CompType=Diode, Io_A=3, LatestRevisionDate=2015-04-26, MountType=SMT, PackageReference=SMA, PartNumber=MBRA340T3G, Published=2008-06-26, Publisher="Texas Instruments", RJC_CperW=15, Supplier 1=Farnell, SymbolVersion=2008-12-08, Type=Schottky, U/M=EA, Vf_V=0.415, Vr_V=40, Simulation ModelName=Dmbra340t3, Simulation PortMap=(1:2),(2:1)
D2 D3 D8: library part 150060GS75000, "LED, Green, SMD", Color=Green, Manufacturer="Wurth Elektronik", Supplier Part Number 1=732-4971-1-ND, Value1=W, Value2=3.2V, Angle=140, ComponentLink1Description="Datasheet link", ComponentLink1URL=http://katalog.we-online.de/led/datasheet/150060GS75000.pdf, CompType=LED, Io_A=0.02, LatestRevisionDate=2015-04-23, MountType=SMT, PackageReference=LED_0603, PartNumber=150060GS75000, Published=2008-07-11, Publisher="Texas Instruments", RoHS=Y, Supplier 1=Digi-Key, Supplier 2=Mouser, Supplier 3=Farnell, Supplier Part Number 2=710-150060GS75000, Supplier Part Number 3=2322070, SymbolVersion=2008-11-06, TJmax_C=85, Type=InGaN, U/M=EA, Vf_V=3.2
D4 D6: library part 150060SS75000, "LED, Super Red, SMD", Color="super red", Manufacturer="Wurth Elektronik", Supplier Part Number 1=732-4979-1-ND, Value1=W, Value2=1.9V, ComponentLink1Description="Datasheet link", ComponentLink1URL=http://katalog.we-online.de/led/datasheet/150060SS75000.pdf, CompType=LED, Io_A=0.02, LatestRevisionDate=2015-04-23, MountType=SMT, PackageReference=LED_0603, PartNumber=150060SS75000, Published=2008-07-11, Publisher="Texas Instruments", RoHS=Y, Supplier 1=Digi-Key, SymbolVersion=2008-11-06, Type=AlInGaP, U/M=EA, Vf_V=1.9
D5: library part 150060YS75000, "LED, Yellow, SMD", Color=yellow, Manufacturer="Wurth Elektronik", Supplier Part Number 1=732-4981-1-ND, Value1=W, Value2=2V, ComponentLink1Description="Datasheet link", ComponentLink1URL=http://katalog.we-online.de/led/datasheet/150060YS75000.pdf, CompType=LED, Io_A=0.02, LatestRevisionDate=2015-04-23, MountType=SMT, PackageReference=LED_0603, PartNumber=150060YS75000, Published=2008-07-11, Publisher="Texas Instruments", RoHS=Y, Supplier 1=Digi-Key, SymbolVersion=2008-11-06, Type=AlInGaP, U/M=EA, Vf_V=2
D7: library part 3SMAJ5926B, "Diode, Zener, 11 V, DO-214AC", Manufacturer="Littelfuse Inc.", PartNumber=SMAJ14CA, ComponentLink1Description="Datasheet link", ComponentLink1URL=http://www.mccsemi.com/up_pdf/3SMAJ5913B~3SMAJ5943B%28DO-214AC%29.pdf, CompType=Zener, MountType=SMT, RoHS=Y, SymbolCreator=x0199378, SymbolVersion=2015-06-17
D9: library part MMSZ4683-V, "Diode, Zener, 3 V, 500 mW, SOD-123", Manufacturer=Vishay-Semiconductor, Power_W=0.5, Supplier Part Number 1=69R4754, Value1=0.5W, ComponentLink1Description="Datasheet link", ComponentLink1URL=http://www.vishay.com/docs/85773/mmsz4681.pdf, CompType=Zener, LatestRevisionDate=2015-03-27, LatestRevisionNote="Updated Supplier Data", MountType=SMT, PackageReference=SOD-123, PartNumber=MMSZ4683-V, Published=2008-10-08, Publisher="Texas Instruments", RJA_CperW=67, RoHS=Y, Supplier 1=Newark, SymbolCreator=a0412235, SymbolVersion=2010-08-25, U/M=EA, Vr_V=N/A, Vz_V=3
D10: "Diode, Ultrafast, 1300 V, 1 A, SMA", Manufacturer=Vishay-Semiconductor, Supplier Part Number 1=BYG23T-M3/CT-ND, Value1=1A, Value2=1.9V, ComponentLink1Description="Datasheet link", ComponentLink1URL=http://www.vishay.com/docs/89429/byg23t.pdf, CompType=Diode, Io_A=1, LatestRevisionDate=2015-06-16, MountType=SMT, PackageReference=SMA, PartNumber=BYG23T-M3/TR, Published=2008-06-26, Publisher="Texas Instruments", RoHS=Y, Supplier 1=Digi-Key, Supplier 2=Mouser, Supplier 3=Farnell, Supplier Part Number 2=78-BYG23T-M3/TR, Supplier Part Number 3=2115184, SymbolVersion=2008-12-08, TJmax_C=150, Type=Ultrafast, U/M=EA, Vf_V=1.9, Vr_V=1300
D11: library part MMSZ5234BS-7-F, "Diode, Zener, 6.2 V, 200 mW, SOD-323", Manufacturer="Diodes Inc.", Power_W=0.2, Supplier Part Number 1=MMSZ5234BS-FDICT-ND, Value1=0.2W, ComponentLink1Description="Datasheet link", ComponentLink1URL=http://www.diodes.com/datasheets/ds31038.pdf, CompType=Zener, LatestRevisionDate=2015-06-15, LatestRevisionNote="Updated Supplier Data", MountType=SMT, PackageReference=SOD-323, PartNumber=MMSZ5234BS-7-F, Published=2008-10-08, Publisher="Texas Instruments", RJA_CperW=350, RoHS=Y, Supplier 1=Digi-Key, Supplier 2=Mouser, Supplier Part Number 2=621-MMSZ5234BS-F, SymbolCreator=a0412235, SymbolVersion=2010-08-25, U/M=EA, Vr_V=N/A, Vz_V=6.2
D12 D13 D14 D15 D16: "Diode, Switching, 75 V, 0.3 A, SOD-523", Manufacturer="Micro Commercial Components", Supplier Part Number 1=1N4148XTPMSCT-ND, Value1=0.3A, Value2=1.25V, ComponentLink1Description="Datasheet link", ComponentLink1URL=http://www.mccsemi.com/up_pdf/1N4148X(SOD-523).PDF, CompType=Diode, Io_A=0.3, LatestRevisionDate=2015-06-16, MountType=SMT, PackageReference=SOD-523, PartNumber=1N4148X-TP, Published=2008-06-26, Publisher="Texas Instruments", RoHS=Y, Supplier 1=Digi-Key, Supplier 2=Mouser, Supplier 3=Newark, Supplier Part Number 2=833-1N4148X-TP, Supplier Part Number 3=69R6666, SymbolVersion=2008-12-08, TJmax_C=150, Type=Switching, U/M=EA, Vf_V=1.25, Vr_V=75
J1: library part 22-23-2061_1, "Header, 2.54 mm, 6x1, Tin, TH", Manufacturer=Molex, PartNumber=22-23-2061, Supplier Part Number 1=WM4204-ND, ClassName=Header, ComponentLink1Description="Datasheet Link", ComponentLink1URL=http://www.molex.com/pdm_docs/sd/022232061_sd.pdf, CompType=Header, LatestRevisionDate=2015-04-17, MountType=TH, PackageReference="Header, 2.54mm, 6x1, TH", Publisher="Texas Instruments", RoHS=Y, Supplier 1=Digi-Key, Supplier 2=Mouser, Supplier 3=Farnell, Supplier Part Number 2=538-22-23-2061, Supplier Part Number 3=1462922, SymbolCreator=a0412235, SymbolVersion=2013-08-30, U/M=EA
J2: library part 22-23-2061, "Header, 2.54 mm, 6x1, Tin, TH", Manufacturer=Molex, Supplier Part Number 1=WM4204-ND, ClassName=Header, ComponentLink1Description="Datasheet Link", ComponentLink1URL=http://www.molex.com/pdm_docs/sd/022232061_sd.pdf, CompType=Header, LatestRevisionDate=2015-04-17, MountType=TH, PackageReference="Header, 2.54mm, 6x1, TH", PartNumber=22-23-2061, Publisher="Texas Instruments", RoHS=Y, Supplier 1=Digi-Key, Supplier 2=Mouser, Supplier 3=Farnell, Supplier Part Number 2=538-22-23-2061, Supplier Part Number 3=1462922, SymbolCreator=a0412235, SymbolVersion=2013-08-30, U/M=EA
J3: library part 0022112042, "Header (friction lock), 100mil, 4x1, Gold, TH", Manufacturer=Molex, Supplier Part Number 1=WM2702-ND, ComponentLink1Description="Datasheet Link", ComponentLink1URL=http://www.molex.com/pdm_docs/sd/022112042_sd.pdf, CompType=Header, LatestRevisionDate=2015-04-17, MountType=TH, PackageReference="Header 4x1 keyed", PartNumber=0022112042, Publisher="Texas Instruments", RoHS=Y, Supplier 1=Digi-Key, SymbolCreator=a0412235, SymbolVersion=2013-08-30, U/M=EA
MH1 MH2 MH3 MH4: library part "Mounting Hole"
Q1: "Synchronous Buck NexFET Power Block, DQY0008A", Alternate Manufacturer="Texas Instruments", PartNumber=CSD87353Q5D, ComponentLink1Description="Datasheet Link", ComponentLink1URL=http://www.ti.com/lit/ds/symlink/csd87353q5d.pdf, CompType=IC, LatestRevisionDate=2015-05-04, Manufacturer="Texas Instruments", MountType=SMT, PackageReference=DQY0008A, Publisher="Texas Instruments", RoHS=Y, SymbolCreator=a0799628, SymbolVersion=2014-11-03, U/M=EA
Q2 Q7 Q8 Q9: library part "MMBT3904T-7-F, Diodes Inc.", "Transistor, NPN, 40 V, 0.2 A, SOT-523", Manufacturer="Diodes Inc.", PartNumber=MMBT3904T-7-F, Supplier Part Number 1=MMBT3904T-FDICT-ND, Value1="0.2 A", Value2=300, ComponentLink1Description="Datasheet link", ComponentLink1URL=http://www.diodes.com/datasheets/ds30270.pdf, CompType=BJT, HfeMax=300, IcRated_A=0.2, LatestRevisionDate=2015-04-22, MountType=SMT, NPN=1, PackageReference=SOT-523, PNP=0, Published=2008-07-31, Publisher="Texas Instruments", RoHS=Y, Supplier 1=Digi-Key, Supplier 2=Mouser, Supplier 3=Farnell, Supplier Part Number 2=621-MMBT3904T-F, Supplier Part Number 3=1773615, SymbolVersion=2008-07-31, TaMax_C=150, TaMin_C=-55, U/M=EA, Vceo_V=40, Vcesat1_V=0.2
Q3 Q6: "MOSFET, N-CH, 30 V, 5 A, SON 2x2mm", Alternate Manufacturer=None, Manufacturer="Texas Instruments", Supplier Part Number 1=296-27233-1-ND, Value1="0.026 ohm", Value2="2.1 nC", ChType=N, ComponentLink1Description="Datasheet link", ComponentLink1URL=http://www.ti.com/lit/ds/symlink/csd17313q2.pdf, CompType=MOSFET, IdsMax_A=5, LatestRevisionDate=2015-04-24, LatestRevisionNote="Added parts.", MountType=SMT, PackageReference="SON 2x2mm", PartNumber=CSD17313Q2, Published=2008-06-19, Publisher="Texas Instruments", QgTyp_nC=2.1, Rdson45_ohm=0.026, RoHS=Y, Supplier 1=Digi-Key, Supplier 2=Mouser, Supplier 3=Farnell, Supplier Part Number 2=595-CSD17313Q2, Supplier Part Number 3=1863737, SymbolVersion=2011-11-14, U/M=EA, VdsMax_V=30, Vgs_V=10, Simulation ModelName=CSD17313Q2, Simulation PortMap=(1:1),(2:1),(3:2),(4:3),(5:1),(6:1),(7:3),(8:1)
Q4: "TRANSISTOR, NPN, 60V, 1A, SOT23-3", Manufacturer="DIODES INCORPORATED", ComponentLink1Description="Datasheet Link", ComponentLink1URL=http://www.diodes.com/datasheets/DSS4160T.pdf, CompType="Bipolar Transistor", MountType=SMT, PartNumber=DSS4160T, RoHS=Y, SymbolCreator=x0199378, SymbolVersion=2015-06-17
Q5: library part TR-MMBT3906T-7-F, "Bipolar, PNP, -40V, -200mA, -200mW", Manufacturer=Diodes, PartNumber=MMBT3906T-7-F, Area=11904, ComponentHeight="0.031 inch", ComponentLink1Description="AEO Datasheet Link", ComponentLink1URL=\\vette02\pmp_pcb\pcad_pdf's\MMBT3906T.pdf, PackageReference=SOT-523, SymbolVersion="10/27/2008 11:09:08"
R1 R27: library part CRCW06032K20JNEA, "RES, 2.2 k, 5%, 0.1 W, 0603", Manufacturer=Vishay-Dale, Power_W=0.1, Supplier Part Number 1=541-2.2KGCT-ND, TempCo="200 ppm/C", Tolerance_%=5, Value1=5%, Value2=0.1W, Value_Code=2k20, ValueDisplayed=2.2k, ComponentLink1Description="Datasheet link", ComponentLink1URL=http://www.vishay.com/docs/20035/dcrcwe3.pdf, CompType=Resistor, EIA_Code=E24, LatestRevisionDate=2015-06-13, MountType=SMT, PackageReference=0603, PartNumber=CRCW06032K20JNEA, Published=2008-06-26, Publisher="Texas Instruments", Res_ohm=2200, RoHS=Y, Supplier 1=Digi-Key, Supplier 2=Farnell, Supplier 3=Newark, Supplier Part Number 2=1652868, Supplier Part Number 3=59M6776, SymbolVersion=2009-05-29, Technology="Thick Film", U/M=EA, VDC_V=75, Simulation ModelName=Resistor, Simulation PortMap=(1:1),(2:2)
R2 R3 R11 R12 R13 R14 R28 R29 R42 R45: library part RC0603JR-074K7L, "RES, 4.7 k, 5%, 0.1 W, 0603", Manufacturer="Yageo America", Power_W=0.1, Supplier Part Number 1=311-4.7KGRCT-ND, TempCo="100 ppm/C", Tolerance_%=5, Value1=5%, Value2=0.1W, Value_Code=4k70, ComponentLink1Description="Datasheet link", ComponentLink1URL=http://www.yageo.com/pdf/Pu-RC0603_51_PbFree_L_2.pdf, CompType=Resistor, EIA_Code=E24, LatestRevisionDate=2015-04-17, MountType=SMT, PackageReference=0603, PartNumber=RC0603JR-074K7L, Published=2008-06-26, Publisher="Texas Instruments", Res_ohm=4700, RoHS=Y, Supplier 1=Digi-Key, Supplier 2=Mouser, Supplier 3=Farnell, Supplier Part Number 2=603-RC0603JR-074K7L, Supplier Part Number 3=9233466, SymbolVersion=2009-05-29, Technology="Thick Film", U/M=EA, VDC_V=50, Simulation ModelName=Resistor, Simulation PortMap=(1:1),(2:2)
R4 R6 R33 R35 R36 R43 R44 R49: library part CRCW06031K00JNEA, "RES, 1.0 k, 5%, 0.1 W, 0603", Manufacturer=Vishay-Dale, Power_W=0.1, Supplier Part Number 1=541-1.0KGCT-ND, TempCo="200 ppm/C", Tolerance_%=5, Value1=5%, Value2=0.1W, Value_Code=1k00, ValueDisplayed=1.0k, ComponentLink1Description="Datasheet link", ComponentLink1URL=http://www.vishay.com/docs/20035/dcrcwe3.pdf, CompType=Resistor, EIA_Code=E24, LatestRevisionDate=2015-04-17, MountType=SMT, PackageReference=0603, PartNumber=CRCW06031K00JNEA, Published=2008-06-26, Publisher="Texas Instruments", Res_ohm=1000, RoHS=Y, Supplier 1=Digi-Key, Supplier 2=Mouser, Supplier 3=Farnell, Supplier Part Number 2=71-CRCW0603J-1.0K-E3, Supplier Part Number 3=1652851, SymbolVersion=2009-05-29, Technology="Thick Film", U/M=EA, VDC_V=75, Simulation ModelName=Resistor, Simulation PortMap=(1:1),(2:2)
R5: library part CRCW060310R0JNEA, "RES, 10, 5%, 0.1 W, 0603", Manufacturer=Vishay-Dale, Power_W=0.1, Supplier Part Number 1=541-10GCT-ND, TempCo="200 ppm/C", Tolerance_%=5, Value1=5%, Value2=0.1W, Value_Code=10R0, ValueDisplayed=10, ComponentLink1Description="Datasheet link", ComponentLink1URL=http://www.vishay.com/docs/20035/dcrcwe3.pdf, CompType=Resistor, EIA_Code=E24, LatestRevisionDate=2015-06-13, MountType=SMT, PackageReference=0603, PartNumber=CRCW060310R0JNEA, Published=2008-06-26, Publisher="Texas Instruments", Res_ohm=10, RoHS=Y, Supplier 1=Digi-Key, Supplier 2=Mouser, Supplier 3=Farnell, Supplier Part Number 2=71-CRCW0603J-10-E3, Supplier Part Number 3=1514712, SymbolVersion=2009-05-29, Technology="Thick Film", U/M=EA, VDC_V=75, Simulation ModelName=Resistor, Simulation PortMap=(1:1),(2:2)
R7 R22: library part CRCW06030000Z0EA, "RES, 0, 5%, 0.1 W, 0603", Manufacturer=Vishay-Dale, Power_W=0.1, Supplier Part Number 1=541-0.0GCT-ND, TempCo="200 ppm/C", Tolerance_%=5, Value1=5%, Value2=0.1W, Value_Code=0000, ValueDisplayed=0, ComponentLink1Description="Datasheet link", ComponentLink1URL=http://www.vishay.com/docs/20035/dcrcwe3.pdf, CompType=Resistor, EIA_Code=E24, LatestRevisionDate=2015-05-02, MountType=SMT, PackageReference=0603, PartNumber=CRCW06030000Z0EA, Published=2008-06-26, Publisher="Texas Instruments", Res_ohm=0, RoHS=Y, Supplier 1=Digi-Key, Supplier 2=Mouser, Supplier 3=Farnell, Supplier Part Number 2=71-CRCW0603-0-E3, Supplier Part Number 3=1469739, SymbolVersion=2009-05-29, Technology="Thick Film", U/M=EA, VDC_V=75
R8 R9: library part CRCW25121R00FKEG, "RES, 1.00, 1%, 1 W, 2512", Manufacturer=Vishay-Dale, Power_W=1, Supplier Part Number 1=541-1.00AAFCT-ND, TempCo="100 ppm/C", Value1=1%, Value2=1W, Value_Code=1R00, ValueDisplayed=1.00, ComponentLink1Description="Datasheet link", ComponentLink1URL=http://www.vishay.com/doc?20035, CompType=Resistor, EIA_Code=E96, LatestRevisionDate=2015-04-21, MountType=SMT, PackageReference=2512, PartNumber=CRCW25121R00FKEG, Published=2008-06-26, Publisher="Texas Instruments", Res_ohm=1, RoHS=Y, Supplier 1=Digi-Key, SymbolVersion=2009-05-29, Technology="Thick Film", Tolerance_%=1, U/M=EA, VDC_V=500, Simulation ModelName=Resistor, Simulation PortMap=(1:1),(2:2)
R10 R15: library part CRCW25122R00FKEG, "RES, 2.00, 1%, 1 W, 2512", Manufacturer=Vishay-Dale, Power_W=1, Supplier Part Number 1=541-2.00AFCT-ND, TempCo="100 ppm/C", Value1=1%, Value2=1W, Value_Code=2R00, ValueDisplayed=2.00, ComponentLink1Description="Datasheet link", ComponentLink1URL=http://www.vishay.com/doc?20035, CompType=Resistor, EIA_Code=E96, LatestRevisionDate=2015-04-21, MountType=SMT, PackageReference=2512, PartNumber=CRCW25122R00FKEG, Published=2008-06-26, Publisher="Texas Instruments", Res_ohm=2, RoHS=Y, Supplier 1=Digi-Key, SymbolVersion=2009-05-29, Technology="Thick Film", Tolerance_%=1, U/M=EA, VDC_V=500, Simulation ModelName=Resistor, Simulation PortMap=(1:1),(2:2)
R16 R17 R18 R19 R20 R21 R39: library part CRCW060310K0JNEA, "RES, 10 k, 5%, 0.1 W, 0603", Manufacturer=Vishay-Dale, Power_W=0.1, Supplier Part Number 1=541-10KGCT-ND, TempCo="200 ppm/C", Tolerance_%=5, Value1=5%, Value2=0.1W, Value_Code=10k0, ValueDisplayed=10k, ComponentLink1Description="Datasheet link", ComponentLink1URL=http://www.vishay.com/docs/20035/dcrcwe3.pdf, CompType=Resistor, EIA_Code=E24, LatestRevisionDate=2015-04-17, MountType=SMT, PackageReference=0603, PartNumber=CRCW060310K0JNEA, Published=2008-06-26, Publisher="Texas Instruments", Res_ohm=10000, RoHS=Y, Supplier 1=Digi-Key, Supplier 2=Mouser, Supplier 3=Farnell, Supplier Part Number 2=71-CRCW0603J-10K-E3, Supplier Part Number 3=1469749, SymbolVersion=2009-05-29, Technology="Thick Film", U/M=EA, VDC_V=75, Simulation ModelName=Resistor, Simulation PortMap=(1:1),(2:2)
R23: library part CRCW0603332KFKEA, "RES, 332 k, 1%, 0.1 W, 0603", Manufacturer=Vishay-Dale, Power_W=0.1, Supplier Part Number 1=541-332KHCT-ND, TempCo="100 ppm/C", Tolerance_%=1, Value1=1%, Value2=0.1W, Value_Code=332k, ComponentLink1Description="Datasheet link", ComponentLink1URL=http://www.vishay.com/docs/20035/dcrcwe3.pdf, CompType=Resistor, EIA_Code=E96, LatestRevisionDate=2015-04-17, MountType=SMT, PackageReference=0603, PartNumber=CRCW0603332KFKEA, Published=2008-06-26, Publisher="Texas Instruments", Res_ohm=332000, RoHS=Y, Supplier 1=Digi-Key, Supplier 2=Mouser, Supplier 3=Farnell, Supplier Part Number 2=71-CRCW0603-332K-E3, Supplier Part Number 3=1151950, SymbolVersion=2009-05-29, Technology="Thick Film", U/M=EA, ValueDisplayed=332k, VDC_V=75, Simulation ModelName=Resistor, Simulation PortMap=(1:1),(2:2)
R24: library part CRCW0603390RJNEA, "RES, 390, 5%, 0.1 W, 0603", Manufacturer=Vishay-Dale, Power_W=0.1, Supplier Part Number 1=541-390GCT-ND, TempCo="200 ppm/C", Tolerance_%=5, Value1=5%, Value2=0.1W, Value_Code=390R, ValueDisplayed=390, ComponentLink1Description="Datasheet link", ComponentLink1URL=http://www.vishay.com/docs/20035/dcrcwe3.pdf, CompType=Resistor, EIA_Code=E24, LatestRevisionDate=2015-06-13, MountType=SMT, PackageReference=0603, PartNumber=CRCW0603390RJNEA, Published=2008-06-26, Publisher="Texas Instruments", Res_ohm=390, RoHS=Y, Supplier 1=Digi-Key, Supplier 2=Mouser, Supplier 3=Farnell, Supplier Part Number 2=71-CRCW0603J-390-E3, Supplier Part Number 3=1739156, SymbolVersion=2009-05-29, Technology="Thick Film", U/M=EA, VDC_V=75, Simulation ModelName=Resistor, Simulation PortMap=(1:1),(2:2)
R25: library part CRCW060315R0JNEA, "RES, 15, 5%, 0.1 W, 0603", Manufacturer=Vishay-Dale, Power_W=0.1, Supplier Part Number 1=541-15GCT-ND, TempCo="200 ppm/C", Tolerance_%=5, Value1=5%, Value2=0.1W, Value_Code=15R0, ValueDisplayed=15, ComponentLink1Description="Datasheet link", ComponentLink1URL=http://www.vishay.com/docs/20035/dcrcwe3.pdf, CompType=Resistor, EIA_Code=E24, LatestRevisionDate=2015-06-13, MountType=SMT, PackageReference=0603, PartNumber=CRCW060315R0JNEA, Published=2008-06-26, Publisher="Texas Instruments", Res_ohm=15, RoHS=Y, Supplier 1=Digi-Key, Supplier 2=Mouser, Supplier 3=Farnell, Supplier Part Number 2=71-CRCW0603J-15-E3, Supplier Part Number 3=1514720, SymbolVersion=2009-05-29, Technology="Thick Film", U/M=EA, VDC_V=75, Simulation ModelName=Resistor, Simulation PortMap=(1:1),(2:2)
R26 R48: library part CRCW0603100KJNEA, "RES, 100 k, 5%, 0.1 W, 0603", Manufacturer=Vishay-Dale, Power_W=0.1, Supplier Part Number 1=541-100KGCT-ND, TempCo="200 ppm/C", Tolerance_%=5, Value1=5%, Value2=0.1W, Value_Code=100k, ComponentLink1Description="Datasheet link", ComponentLink1URL=http://www.vishay.com/docs/20035/dcrcwe3.pdf, CompType=Resistor, EIA_Code=E24, LatestRevisionDate=2015-04-06, MountType=SMT, PackageReference=0603, PartNumber=CRCW0603100KJNEA, Published=2008-06-26, Publisher="Texas Instruments", Res_ohm=100000, RoHS=Y, Supplier 1=Digi-Key, Supplier 2=Mouser, Supplier 3=Farnell, Supplier Part Number 2=71-CRCW0603J-100K-E3, Supplier Part Number 3=1692517, SymbolVersion=2009-05-29, Technology="Thick Film", U/M=EA, VDC_V=75, Simulation ModelName=Resistor, Simulation PortMap=(1:1),(2:2)
R30: library part CRCW060310R0FKEAHP, "RES, 10.0, 1%, 0.25 W, 0603", Manufacturer=Vishay-Dale, Power_W=0.25, Supplier Part Number 1=541-10.0SCT-ND, TempCo="100 ppm/C", Tolerance_%=1, Value1=1%, Value2=0.25W, Value_Code=10R0, ValueDisplayed=10.0, ComponentLink1Description="Datasheet link", ComponentLink1URL=http://www.vishay.com/docs/20043/crcwhpe3.pdf, CompType=Resistor, EIA_Code=E96, LatestRevisionDate=2015-06-13, MountType=SMT, PackageReference=0603, PartNumber=CRCW060310R0FKEAHP, Published=2008-06-26, Publisher="Texas Instruments", Res_ohm=10, RoHS=Y, Supplier 1=Digi-Key, Supplier 2=Mouser, Supplier Part Number 2=71-CRCW060310R0FKEAH, SymbolVersion=2009-05-29, Technology="Thick Film", U/M=EA, VDC_V=75, Simulation ModelName=Resistor, Simulation PortMap=(1:1),(2:2)
R31: library part CRCW0603330RJNEA, "RES, 330, 5%, 0.1 W, 0603", Manufacturer=Vishay-Dale, Power_W=0.1, Supplier Part Number 1=541-330GCT-ND, TempCo="200 ppm/C", Tolerance_%=5, Value1=5%, Value2=0.1W, Value_Code=330R, ValueDisplayed=330, ComponentLink1Description="Datasheet link", ComponentLink1URL=http://www.vishay.com/docs/20035/dcrcwe3.pdf, CompType=Resistor, EIA_Code=E24, LatestRevisionDate=2015-04-17, MountType=SMT, PackageReference=0603, PartNumber=CRCW0603330RJNEA, Published=2008-06-26, Publisher="Texas Instruments", Res_ohm=330, RoHS=Y, Supplier 1=Digi-Key, Supplier 2=Mouser, Supplier 3=Farnell, Supplier Part Number 2=71-CRCW0603J-330-E3, Supplier Part Number 3=1692522, SymbolVersion=2009-05-29, Technology="Thick Film", U/M=EA, VDC_V=75, Simulation ModelName=Resistor, Simulation PortMap=(1:1),(2:2)